# Altium PCB PCB1.PcbDoc (part 3 of 3)
Units mm, origin at the board's own origin, x right, y up, seen from the top; angles counter-clockwise.
Board outline 68.5 x 51.7 mm, 2 copper layers (Top Layer, Bottom Layer); 40 components, 24 nets, 162 pads, 41 vias.
Unrouted connection lines stored in the file: 2.
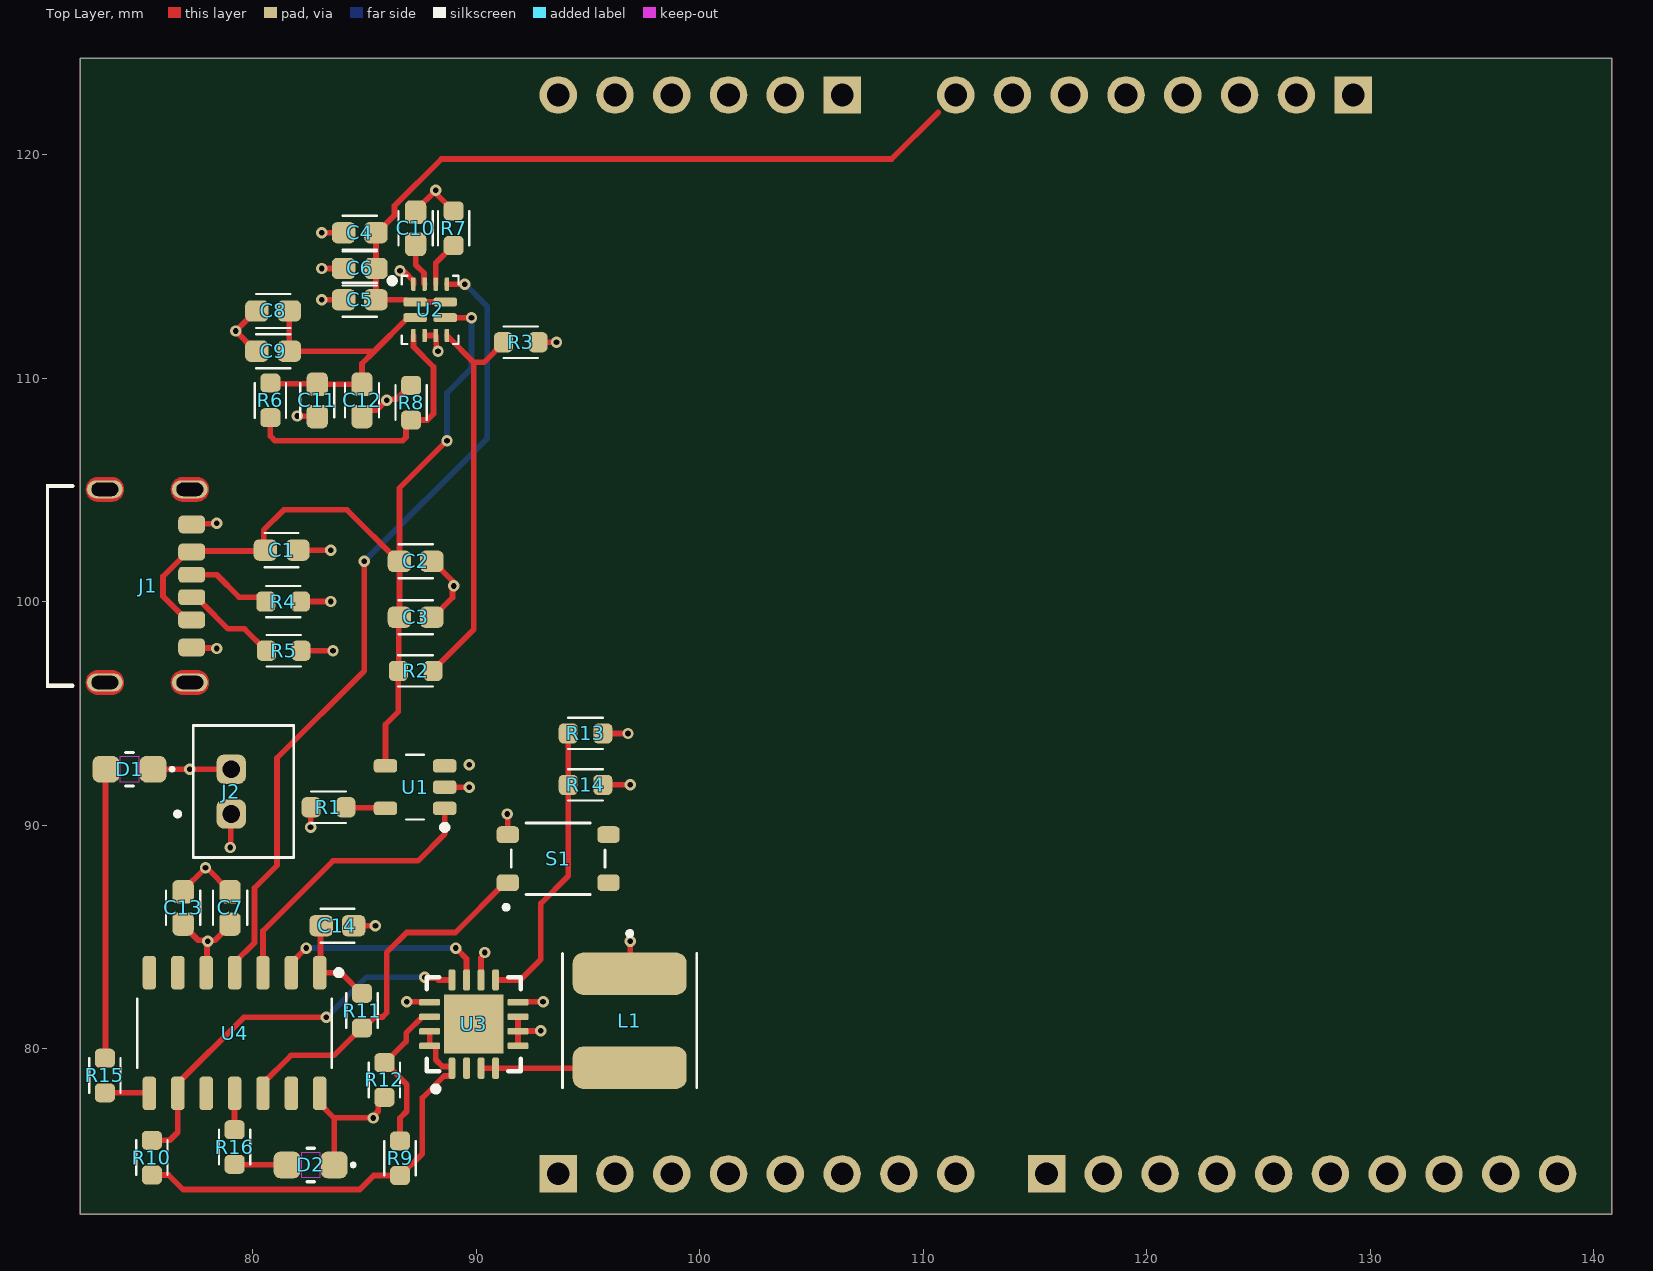
[diagram p0: Top Layer view]

## Part data (continued)
R14: library part "RESISTOR - GENERIC", "Res Thick Film 0603 390K Ohm 1% 0.1W(1/10W) ±100ppm/C Pad SMD T/R", .Case/Package=0603, .Tolerance=1%, Manufacturer="Yageo Group", Manufacturer Part Number=RC0603FR-07390KL, Max Operating Temperature=155°C, Max Power Dissipation=100mW, Min Operating Temperature=-55°C, Supplier Part Number=311-390KHRCT-ND, Temperature Coefficient=100ppm/°C, Voltage Rating=75V, Voltage Rating (AC)=50V, Case Code (Imperial)=0603, Case/Package=0603, Category="Chip SMD Resistors", China RoHS=Non-Compliant, ComponentLink1Description=https://datasheet.octopart.com:443/RC0603FR-07390KL-Yageo-datasheet-175887523.pdf?src-supplier=IHS, ComponentLink1URL=https://datasheet.octopart.com:443/RC0603FR-07390KL-Yageo-datasheet-175887523.pdf?src-supplier=IHS, ComponentLink2Description=https://datasheet.octopart.com:443/RC0603FR-07390KL-Yageo-datasheet-103092701.pdf?src-supplier=Upverter, ComponentLink2URL=https://datasheet.octopart.com:443/RC0603FR-07390KL-Yageo-datasheet-103092701.pdf?src-supplier=Upverter, ComponentLink3Description=https://datasheet.octopart.com:443/RC0603FR-07390KL-Yageo-datasheet-8328172.pdf?src-supplier=Newark, ComponentLink3URL=https://datasheet.octopart.com:443/RC0603FR-07390KL-Yageo-datasheet-8328172.pdf?src-supplier=Newark, ComponentLink4Description=https://datasheet.octopart.com:443/RC0603FR-07390KL-Yageo-datasheet-62067350.pdf?src-supplier=Newark, ComponentLink4URL=https://datasheet.octopart.com:443/RC0603FR-07390KL-Yageo-datasheet-62067350.pdf?src-supplier=Newark, ComponentLink5Description=https://datasheet.octopart.com:443/RC0603FR-07390KL-Yageo-datasheet-164759695.pdf?src-supplier=Future+Electronics, ComponentLink5URL=https://datasheet.octopart.com:443/RC0603FR-07390KL-Yageo-datasheet-164759695.pdf?src-supplier=Future+Electronics, ComponentLink6Description=https://datasheet.octopart.com:443/RC0603FR-07390KL-Yageo-datasheet-137700087.pdf?src-supplier=Future+Electronics, ComponentLink6URL=https://datasheet.octopart.com:443/RC0603FR-07390KL-Yageo-datasheet-137700087.pdf?src-supplier=Future+Electronics, ComponentLink7Description=https://datasheet.octopart.com:443/RC0603FR-07390KL-Yageo-datasheet-127823281.pdf?src-supplier=Future+Electronics, ComponentLink7URL=https://datasheet.octopart.com:443/RC0603FR-07390KL-Yageo-datasheet-127823281.pdf?src-supplier=Future+Electronics, ComponentLink8Description=https://datasheet.octopart.com:443/RC0603FR-07390KL-Yageo-datasheet-27584510.pdf?src-supplier=Future+Electronics, ComponentLink8URL=https://datasheet.octopart.com:443/RC0603FR-07390KL-Yageo-datasheet-27584510.pdf?src-supplier=Future+Electronics, ComponentLink9Description=https://datasheet.octopart.com:443/RC0603FR-07390KL-Yageo-datasheet-15599030.pdf?src-supplier=Future+Electronics, ComponentLink9URL=https://datasheet.octopart.com:443/RC0603FR-07390KL-Yageo-datasheet-15599030.pdf?src-supplier=Future+Electronics, ComponentLink10Description=https://datasheet.octopart.com:443/RC0603FR-07390KL-Yageo-datasheet-12596169.pdf?src-supplier=Future+Electronics, ComponentLink10URL=https://datasheet.octopart.com:443/RC0603FR-07390KL-Yageo-datasheet-12596169.pdf?src-supplier=Future+Electronics, ComponentLink11Description=https://datasheet.octopart.com:443/RC0603FR-07390KL-Yageo-datasheet-148775077.pdf?src-supplier=TME, ComponentLink11URL=https://datasheet.octopart.com:443/RC0603FR-07390KL-Yageo-datasheet-148775077.pdf?src-supplier=TME, ComponentLink12Description=https://datasheet.octopart.com/RC0603FR-07390KL-Yageo-datasheet-73766026.pdf, ComponentLink12URL=https://datasheet.octopart.com/RC0603FR-07390KL-Yageo-datasheet-73766026.pdf, ComponentLink13Description=https://datasheet.octopart.com:443/RC0603FR-07390KL-Yageo-datasheet-118562.pdf?src-supplier=DigiKey, ComponentLink13URL=https://datasheet.octopart.com:443/RC0603FR-07390KL-Yageo-datasheet-118562.pdf?src-supplier=DigiKey, ComponentLink14Description=http://sigma.octopart.com:80/rohs_statement/Yageo-company-2.pdf?src-supplier=Compliance+Statements, ComponentLink14URL=http://sigma.octopart.com:80/rohs_statement/Yageo-company-2.pdf?src-supplier=Compliance+Statements, ComponentLink15Description=http://sigma.octopart.com:80/conflict_mineral_statement/Yageo-company-3.pdf?src-supplier=Compliance+Statements, ComponentLink15URL=http://sigma.octopart.com:80/conflict_mineral_statement/Yageo-company-3.pdf?src-supplier=Compliance+Statements, Composition="Thick Film", Depth=800µm, Features="Moisture Resistant", Height=450µm, Lead Free="Lead Free", Length=1.6mm, Lifecycle Status=Production, Military Standard=Not, Mounting Technology="Surface Mount", Number of Terminals=2, Number of Terminations=2, Pins=2, Power Dissipation=100mW, Power Rating=100mW, Pricing="1=0,1, 10=0,007, 25=0,0068, 50=0,0062, 100=0,0051 (USD)", REACH SVHC=Yes, RoHS=Compliant, Schedule B="8533210045, 8533210045|8533210045, 8533210045|8533210045|8533210045, 8533210045|8533210045|8533210045|8533210045", Stock=23907, Supplier=DigiKey, Supplier 1=DigiKey, Supplier Part Number 1=311-390KHRCT-ND, Termination=SMD/SMT, Tolerance=1%, Voltage Rating (DC)=50V, Width=800µm, Working Voltage=75V
R15 R16: library part "RESISTOR - GENERIC", "Fixed Resistor, Thin Film, 0.1W, 470ohm, 75V, 1% +/-Tol, 50ppm/Cel, Surface Mount, 0603", .Case/Package=0603, .Tolerance=1%, Manufacturer="Yageo Group", Manufacturer Part Number=RT0603FRE07470RL, Max Operating Temperature=155°C, Min Operating Temperature=-55°C, Power Dissipation=100mW, Supplier Part Number=YAG5742CT-ND, Temperature Coefficient=50ppm/°C, Voltage Rating=75V, Case Code (Imperial)=0603, Case/Package=0603, Category="Chip SMD Resistors", China RoHS=Non-Compliant, ComponentLink1Description=https://datasheet.octopart.com:443/RT0603FRE07470RL-Yageo-datasheet-176402239.pdf?src-supplier=IHS, ComponentLink1URL=https://datasheet.octopart.com:443/RT0603FRE07470RL-Yageo-datasheet-176402239.pdf?src-supplier=IHS, ComponentLink2Description=https://datasheet.octopart.com:443/RT0603FRE07470RL-Yageo-datasheet-96443642.pdf?src-supplier=Upverter, ComponentLink2URL=https://datasheet.octopart.com:443/RT0603FRE07470RL-Yageo-datasheet-96443642.pdf?src-supplier=Upverter, ComponentLink3Description=https://datasheet.octopart.com:443/RT0603FRE07470RL-Yageo-Group-datasheet-188167888.pdf?src-supplier=TME, ComponentLink3URL=https://datasheet.octopart.com:443/RT0603FRE07470RL-Yageo-Group-datasheet-188167888.pdf?src-supplier=TME, ComponentLink4Description=https://datasheet.octopart.com:443/RT0603FRE07470RL-Yageo-datasheet-67645616.pdf?src-supplier=element14+APAC, ComponentLink4URL=https://datasheet.octopart.com:443/RT0603FRE07470RL-Yageo-datasheet-67645616.pdf?src-supplier=element14+APAC, ComponentLink5Description=https://datasheet.octopart.com:443/RT0603FRE07470RL-Yageo-datasheet-10915759.pdf?src-supplier=element14+APAC, ComponentLink5URL=https://datasheet.octopart.com:443/RT0603FRE07470RL-Yageo-datasheet-10915759.pdf?src-supplier=element14+APAC, ComponentLink6Description=https://datasheet.octopart.com:443/RT0603FRE07470RL-Yageo-datasheet-8324589.pdf?src-supplier=Newark, ComponentLink6URL=https://datasheet.octopart.com:443/RT0603FRE07470RL-Yageo-datasheet-8324589.pdf?src-supplier=Newark, ComponentLink7Description=https://datasheet.octopart.com:443/RT0603FRE07470RL-Yageo-datasheet-164439670.pdf?src-supplier=Newark, ComponentLink7URL=https://datasheet.octopart.com:443/RT0603FRE07470RL-Yageo-datasheet-164439670.pdf?src-supplier=Newark, ComponentLink8Description=https://datasheet.octopart.com:443/RT0603FRE07470RL-Yageo-datasheet-169971040.pdf?src-supplier=Future+Electronics, ComponentLink8URL=https://datasheet.octopart.com:443/RT0603FRE07470RL-Yageo-datasheet-169971040.pdf?src-supplier=Future+Electronics, ComponentLink9Description=https://datasheet.octopart.com:443/RT0603FRE07470RL-Yageo-datasheet-166250672.pdf?src-supplier=Future+Electronics, ComponentLink9URL=https://datasheet.octopart.com:443/RT0603FRE07470RL-Yageo-datasheet-166250672.pdf?src-supplier=Future+Electronics, ComponentLink10Description=https://datasheet.octopart.com:443/RT0603FRE07470RL-Yageo-datasheet-137700930.pdf?src-supplier=Future+Electronics, ComponentLink10URL=https://datasheet.octopart.com:443/RT0603FRE07470RL-Yageo-datasheet-137700930.pdf?src-supplier=Future+Electronics, ComponentLink11Description=https://datasheet.octopart.com:443/RT0603FRE07470RL-Yageo-Group-datasheet-141265893.pdf?src-supplier=ODG+(Origin+Data+Global), ComponentLink11URL=https://datasheet.octopart.com:443/RT0603FRE07470RL-Yageo-Group-datasheet-141265893.pdf?src-supplier=ODG+(Origin+Data+Global), ComponentLink12Description=https://datasheet.octopart.com/RT0603FRE07470RL-Yageo-datasheet-86813807.pdf, ComponentLink12URL=https://datasheet.octopart.com/RT0603FRE07470RL-Yageo-datasheet-86813807.pdf, ComponentLink13Description=http://sigma.octopart.com:80/rohs_statement/Yageo-company-2.pdf?src-supplier=Compliance+Statements, ComponentLink13URL=http://sigma.octopart.com:80/rohs_statement/Yageo-company-2.pdf?src-supplier=Compliance+Statements, ComponentLink14Description=http://sigma.octopart.com:80/conflict_mineral_statement/Yageo-company-3.pdf?src-supplier=Compliance+Statements, ComponentLink14URL=http://sigma.octopart.com:80/conflict_mineral_statement/Yageo-company-3.pdf?src-supplier=Compliance+Statements, Composition="Thin Film", Depth=800µm, Height=450µm, Lead Free="Lead Free", Length=1.6mm, Lifecycle Status=Production, Military Standard=Not, Mounting Technology="Surface Mount", Number of Terminals=2, Pins=2, Power Rating=100mW, Pricing="1=0,1, 10=0,010, 25=0,0096, 50=0,0092, 100=0,0087, 250=0,00808, 1000=0,00764 (USD)", REACH SVHC=Yes, RoHS=Compliant, Schedule B="8533210045, 8533210045|8533210045|8533210045|8533210045|8533210045|8533210045|8533210045|8533210045|8533210045|8533210045|8533210045|8533210045|8533210045|8533210045, 8533210045|8533210045|8533210045|8533210045|8533210045|8533210045|8533210045|8533210045|8533210045|8533210045|8533210045|8533210045|8533210045|8533210045|8533210045, 8533210045|8533210045|8533210045|8533210045|8533210045|8533210045|8533210045|8533210045|8533210045|8533210045|8533210045|8533210045|8533210045|8533210045|8533210045|8533210045", Stock=23049, Supplier=DigiKey, Supplier 1=DigiKey, Supplier Part Number 1=YAG5742CT-ND, Termination=SMD/SMT, Tolerance=1%, Voltage Rating (DC)=75V, Width=800µm, Working Voltage=75V
S1: "Switch Tactile N.O. SPST Button Gull Wing 0.05A 12VDC 100000Cycles 1.77N SMD", Contact Resistance=100mΩ, Insulation Resistance=100MΩ, Manufacturer=E-Switch, Max Current Rating=50mA, Max Operating Temperature=70°C, Max Voltage Rating (DC)=12V, Min Operating Temperature=-20°C, Operating Force=1.76N, Package=None, Supplier Part Number=EG5384CT-ND, Category="Tactile Switches", Check_prices=https://www.snapeda.com/parts/TL3365AF180QG/E-Switch/view-part/?ref=eda, ComponentLink1Description=https://datasheet.octopart.com:443/TL3365AF180QG-E-Switch-datasheet-182203474.pdf?src-supplier=IHS, ComponentLink1URL=https://datasheet.octopart.com:443/TL3365AF180QG-E-Switch-datasheet-182203474.pdf?src-supplier=IHS, ComponentLink2Description=https://datasheet.octopart.com:443/TL3365AF180QG-E-Switch-datasheet-188936971.pdf?src-supplier=TME, ComponentLink2URL=https://datasheet.octopart.com:443/TL3365AF180QG-E-Switch-datasheet-188936971.pdf?src-supplier=TME, ComponentLink3Description=https://datasheet.octopart.com:443/TL3365AF180QG-E-Switch-datasheet-62330653.pdf?src-supplier=Electro+Sonic, ComponentLink3URL=https://datasheet.octopart.com:443/TL3365AF180QG-E-Switch-datasheet-62330653.pdf?src-supplier=Electro+Sonic, ComponentLink4Description=https://datasheet.octopart.com:443/TL3365AF180QG-E-Switch-datasheet-181955371.pdf?src-supplier=Farnell, ComponentLink4URL=https://datasheet.octopart.com:443/TL3365AF180QG-E-Switch-datasheet-181955371.pdf?src-supplier=Farnell, ComponentLink5Description=https://datasheet.octopart.com:443/TL3365AF180QG-E-Switch-datasheet-62330039.pdf?src-supplier=Newark, ComponentLink5URL=https://datasheet.octopart.com:443/TL3365AF180QG-E-Switch-datasheet-62330039.pdf?src-supplier=Newark, ComponentLink6Description=https://datasheet.octopart.com:443/TL3365AF180QG-E-Switch-datasheet-155697103.pdf?src-supplier=RS+(Formerly+Allied+Electronics), ComponentLink6URL=https://datasheet.octopart.com:443/TL3365AF180QG-E-Switch-datasheet-155697103.pdf?src-supplier=RS+(Formerly+Allied+Electronics), Contact Material=Silver, Electrical Life=100kcycles, Height=1.55mm, Illumination Type=Non-Illuminated, Lead Free="Lead Free", Length=4.2mm, Lifecycle Status=Production, Manufacturer Part Number=TL3365AF180QG, Mechanical Life=100kcycles, MF=E-Switch, Mounting Technology="Surface Mount", MP=TL3365AF180QG, Number of Positions=1, Pricing="1=0,21, 10=0,181, 25=0,1696, 100=0,1522, 250=0,1412, 500=0,13324, 1000=0,12576 (USD)", REACH SVHC=Yes, RoHS=Compliant, SnapEDA_Link=https://www.snapeda.com/parts/TL3365AF180QG/E-Switch/view-part/?ref=snap, Stock=31658, Supplier=DigiKey, Supplier 1=DigiKey, Supplier Part Number 1=EG5384CT-ND, Switch Function=Off-Mom, Switch Travel=200µm, Termination="Gull Wing", Throw Configuration=SPST
U1: "Linear Battery Charger Controller Li-Ion/Li-Pol 505mA 4.2V 5-Pin SOT-23 T/R", Ambient Temperature Range High=85°C, Case/Package=SOT-23-5, Manufacturer=Microchip, Max Charge Current=500mA, Max Junction Temperature (Tj)=125°C, Max Output Voltage=4.232V, Max Supply Voltage=3.75V, Min Operating Temperature=-40°C, Min Output Voltage=4.168V, Nominal Supply Voltage=6V, Operating Supply Current=510µA, Output Voltage=4.2V, Supplier Part Number=MCP73831T-2DCI/OTCT-ND, Category="Battery Management", ComponentLink1Description=https://datasheet.octopart.com:443/MCP73831T-2DCI/OT-Microchip-datasheet-8814540.pdf?src-supplier=Electro+Sonic, ComponentLink1URL=https://datasheet.octopart.com:443/MCP73831T-2DCI/OT-Microchip-datasheet-8814540.pdf?src-supplier=Electro+Sonic, ComponentLink2Description=https://datasheet.octopart.com:443/MCP73831T-2DCI-OT-Microchip-datasheet-16123459.pdf?src-supplier=Upverter, ComponentLink2URL=https://datasheet.octopart.com:443/MCP73831T-2DCI-OT-Microchip-datasheet-16123459.pdf?src-supplier=Upverter, ComponentLink3Description=https://datasheet.octopart.com:443/MCP73831T-2DCI-OT-Microchip-datasheet-34193478.pdf?src-supplier=Farnell, ComponentLink3URL=https://datasheet.octopart.com:443/MCP73831T-2DCI-OT-Microchip-datasheet-34193478.pdf?src-supplier=Farnell, ComponentLink4Description=https://datasheet.octopart.com:443/MCP73831T-2DCI-OT-Microchip-datasheet-145017548.pdf?src-supplier=Microchip, ComponentLink4URL=https://datasheet.octopart.com:443/MCP73831T-2DCI-OT-Microchip-datasheet-145017548.pdf?src-supplier=Microchip, ComponentLink5Description=https://datasheet.octopart.com:443/MCP73831T-2DCI-OT-Microchip-datasheet-16593012.pdf?src-supplier=element14+APAC, ComponentLink5URL=https://datasheet.octopart.com:443/MCP73831T-2DCI-OT-Microchip-datasheet-16593012.pdf?src-supplier=element14+APAC, ComponentLink6Description=https://datasheet.octopart.com:443/MCP73831T-2DCI-OT-Microchip-datasheet-158592061.pdf?src-supplier=SHENGYU+ELECTRONICS, ComponentLink6URL=https://datasheet.octopart.com:443/MCP73831T-2DCI-OT-Microchip-datasheet-158592061.pdf?src-supplier=SHENGYU+ELECTRONICS, ComponentLink7Description=https://datasheet.octopart.com:443/MCP73831T-2DCI/OT-Microchip-datasheet-98419.pdf?src-supplier=Mouser, ComponentLink7URL=https://datasheet.octopart.com:443/MCP73831T-2DCI/OT-Microchip-datasheet-98419.pdf?src-supplier=Mouser, ComponentLink8Description=https://datasheet.octopart.com:443/MCP73831T-2DCI/OT-Microchip-datasheet-39874.pdf?src-supplier=DigiKey, ComponentLink8URL=https://datasheet.octopart.com:443/MCP73831T-2DCI/OT-Microchip-datasheet-39874.pdf?src-supplier=DigiKey, ComponentLink9Description=http://sigma.octopart.com:80/188449423/materials_sheet/Microchip-MCP73831T-2DCI-OT.pdf?src-supplier=Compliance+Statements, ComponentLink9URL=http://sigma.octopart.com:80/188449423/materials_sheet/Microchip-MCP73831T-2DCI-OT.pdf?src-supplier=Compliance+Statements, ComponentLink10Description=http://sigma.octopart.com:80/conflict_mineral_statement/Microchip-company-68.pdf?src-supplier=Compliance+Statements, ComponentLink10URL=http://sigma.octopart.com:80/conflict_mineral_statement/Microchip-company-68.pdf?src-supplier=Compliance+Statements, ComponentLink11Description=http://sigma.octopart.com:80/conflict_mineral_statement/Microchip-company-69.pdf?src-supplier=Compliance+Statements, ComponentLink11URL=http://sigma.octopart.com:80/conflict_mineral_statement/Microchip-company-69.pdf?src-supplier=Compliance+Statements, ComponentLink12Description=http://sigma.octopart.com:80/reach_statement/Microchip-company-70.pdf?src-supplier=Compliance+Statements, ComponentLink12URL=http://sigma.octopart.com:80/reach_statement/Microchip-company-70.pdf?src-supplier=Compliance+Statements, ComponentLink13Description=http://sigma.octopart.com:80/rohs_statement/Microchip-company-71.pdf?src-supplier=Compliance+Statements, ComponentLink13URL=http://sigma.octopart.com:80/rohs_statement/Microchip-company-71.pdf?src-supplier=Compliance+Statements, Contact Plating=Tin, Country of Assembly=Thailand, Country of Fabrication="United States of America", Country of Origin=Thailand, Export Control Classification Number (ECCN) Code=EAR99, Harmonized Tariff Schedule (HTS) Code=8542.39.0060, Height=1.45mm, Introduction Date=2005-11-03, Length=3.1mm, Lifecycle Status=Production, Manufacturer Part Number=MCP73831T-2DCI/OT, Max Operating Temperature=85°C, Max Output current=500mA, Min Supply Voltage=3.75V, Mounting Technology="Surface Mount", Number of Cells=1, Number of Channels=1, Number of Outputs=1, Output Current=500mA, Pins=5, Pricing="1=0,76, 25=0,63, 100=0,6125 (USD)", Projected EOL Date=2034-11-03, Radiation Hardening=No, REACH SVHC=No, RoHS=Compliant, Schedule B="8542390000, 8542390000|8542390000|8542390000|8542390000|8542390000", Stock=7422, Supplier=DigiKey, Supplier 1=DigiKey, Supplier Part Number 1=MCP73831T-2DCI/OTCT-ND, Width=1.8mm
U2: "2.7-V to 22-V, 56-mΩ, 4.5-A, power mux with seamless switchover 12-VQFN-HR -40 to 125", Manufacturer="Texas Instruments", Manufacturer Lifecycle Status=ACTIVE, Max Junction Temperature (Tj)=125°C, Max Supply Voltage=22V, Min Operating Temperature=-40°C, Min Supply Voltage=2.8V, Nominal Supply Current=300µA, Supplier Part Number=296-53410-1-ND, Category="Power Management ICs", ComponentLink1Description=https://octopart.com:443/opatz8j6/c1?t=u__eRulNICzvJgw_uF5jZE4VewBqqVxAEhH6a5865kfiBS97munyJHNwR89MOISaNIlCSIK0p6tyYn4vgEUwA00NusdUrfnqEnnmQHin85Zj7Xz-CnabDGGSIMRYEyZQyUZ9_1lQhHv-e10ijzu5Fv9_tN07M4ouzl3dHDLjVRc4zqqNSbdG7ZpopHa8efgiYSe1iOCqV1SOo3tsaJDthmCWARnaKZ9V2q5WV2HmYoAlkLRJzefOURIjiIua_VTxhiCJdWFvuMhq2aqOyeKhwV9xg5H8ABnwy4ffoCjAbE9kSmNx4Gy2EKE46MjxT9GaZ6IXNuY9WZuTkrZzflCjnBM8kCWZn_jdciZqHXwHUUgC-0cOcFywywnpHLiGbymgn1lU5mc&src-supplier=Texas+Instruments, ComponentLink1URL=https://octopart.com:443/opatz8j6/c1?t=u__eRulNICzvJgw_uF5jZE4VewBqqVxAEhH6a5865kfiBS97munyJHNwR89MOISaNIlCSIK0p6tyYn4vgEUwA00NusdUrfnqEnnmQHin85Zj7Xz-CnabDGGSIMRYEyZQyUZ9_1lQhHv-e10ijzu5Fv9_tN07M4ouzl3dHDLjVRc4zqqNSbdG7ZpopHa8efgiYSe1iOCqV1SOo3tsaJDthmCWARnaKZ9V2q5WV2HmYoAlkLRJzefOURIjiIua_VTxhiCJdWFvuMhq2aqOyeKhwV9xg5H8ABnwy4ffoCjAbE9kSmNx4Gy2EKE46MjxT9GaZ6IXNuY9WZuTkrZzflCjnBM8kCWZn_jdciZqHXwHUUgC-0cOcFywywnpHLiGbymgn1lU5mc&src-supplier=Texas+Instruments, ComponentLink2Description=http://sigma.octopart.com:80/conflict_mineral_statement/Texas-Instruments-company-63.pdf?src-supplier=Compliance+Statements, ComponentLink2URL=http://sigma.octopart.com:80/conflict_mineral_statement/Texas-Instruments-company-63.pdf?src-supplier=Compliance+Statements, ComponentLink3Description=http://sigma.octopart.com:80/reach_statement/Texas-Instruments-company-64.pdf?src-supplier=Compliance+Statements, ComponentLink3URL=http://sigma.octopart.com:80/reach_statement/Texas-Instruments-company-64.pdf?src-supplier=Compliance+Statements, Height=1mm, Length=2.5mm, Lifecycle Status=Production, Manufacturer Part Number=TPS2121RUXR, Max Operating Temperature=125°C, Number of Outputs=1, Output Voltage=22V, Pins=12, Pricing="1=2,37, 10=1,76, 25=1,6072, 100=1,4391, 250=1,35892, 500=1,31058, 1000=1,27078 (USD)", RoHS=Compliant, Schedule B="8542390000, 8542390000|8542390000|8542390000|8542390000|8542390000", Stock=9752, Supplier=DigiKey, Supplier 1=DigiKey, Supplier Part Number 1=296-53410-1-ND, Thickness=900µm, Width=2mm
U3: "Conv DC-DC 1.8V to 5.5V Synchronous Step Up Single-Out 1.8V to 5.5V 0.5A 16-Pin VQFN EP T/R", Case/Package=VQFN, Manufacturer="Texas Instruments", Manufacturer Lifecycle Status=ACTIVE, Max Operating Temperature=85°C, Max Output current=500mA, Max Output Voltage=5.5V, Min Input Voltage=1.8V, Min Operating Temperature=-40°C, Output Current=2A, Quiescent Current=20µA, Supplier Part Number=296-15259-1-ND, Switching Frequency=600kHz, Category="Voltage Regulators - Switching", ComponentLink1Description=https://sigma.octopart.com:443/179129134/technical_drawing/Texas-Instruments-TPS61090RSAR.pdf?src-supplier=Texas+Instruments, ComponentLink1URL=https://sigma.octopart.com:443/179129134/technical_drawing/Texas-Instruments-TPS61090RSAR.pdf?src-supplier=Texas+Instruments, ComponentLink2Description=https://octopart.com:443/opatz8j6/c1?t=AcQooj3JlTCfhk3VCQUH-aAEBr0wyTfCDEA-x6NEZ2xxPhV97yYYZYKTTzI7ie9NC3rdJUsYEK6CyX6awGzEEcrHtZ_ArfXYtmPr4gKKxI6Kw8agxWkgC3a2xDsXlg-O0fwghwbpb1suK4tlMeroK7wll2-51HzAXEG_iTs83j7TVMfk2sV4EMpy0PTSYrurZmHHqCG8wItxv2OJGrxcCnvFFnZFhd76piKxGXXAjHyftSJJey1je6ukqBFTD2_84SHs_29Ug4OcTy7-Co2GNmDvY-nPAqSt9tN4wM5hyRbOZfDv3RSxiNHdEGiQsBGArixu2cBpknAywPbL-YnUby8ljK6CPTzRMlcqP5D6VeYBdVJmVC4HGqOiiiiHSo5hvGoQOQ&src-supplier=Texas+Instruments, ComponentLink2URL=https://octopart.com:443/opatz8j6/c1?t=AcQooj3JlTCfhk3VCQUH-aAEBr0wyTfCDEA-x6NEZ2xxPhV97yYYZYKTTzI7ie9NC3rdJUsYEK6CyX6awGzEEcrHtZ_ArfXYtmPr4gKKxI6Kw8agxWkgC3a2xDsXlg-O0fwghwbpb1suK4tlMeroK7wll2-51HzAXEG_iTs83j7TVMfk2sV4EMpy0PTSYrurZmHHqCG8wItxv2OJGrxcCnvFFnZFhd76piKxGXXAjHyftSJJey1je6ukqBFTD2_84SHs_29Ug4OcTy7-Co2GNmDvY-nPAqSt9tN4wM5hyRbOZfDv3RSxiNHdEGiQsBGArixu2cBpknAywPbL-YnUby8ljK6CPTzRMlcqP5D6VeYBdVJmVC4HGqOiiiiHSo5hvGoQOQ&src-supplier=Texas+Instruments, ComponentLink3Description=https://datasheet.octopart.com:443/TPS61090RSAR-Texas-Instruments-datasheet-10258986.pdf?src-supplier=Texas+Instruments, ComponentLink3URL=https://datasheet.octopart.com:443/TPS61090RSAR-Texas-Instruments-datasheet-10258986.pdf?src-supplier=Texas+Instruments, ComponentLink4Description=https://sigma.octopart.com:443/49250404/technical_drawing/Texas-Instruments-TPS61090RSAR.pdf?src-supplier=Texas+Instruments, ComponentLink4URL=https://sigma.octopart.com:443/49250404/technical_drawing/Texas-Instruments-TPS61090RSAR.pdf?src-supplier=Texas+Instruments, ComponentLink5Description=https://datasheet.octopart.com:443/TPS61090RSAR-Texas-Instruments-datasheet-149524.pdf?src-supplier=Texas+Instruments, ComponentLink5URL=https://datasheet.octopart.com:443/TPS61090RSAR-Texas-Instruments-datasheet-149524.pdf?src-supplier=Texas+Instruments, ComponentLink6Description=https://datasheet.octopart.com:443/TPS61090RSAR-Texas-Instruments-datasheet-128166.pdf?src-supplier=Texas+Instruments, ComponentLink6URL=https://datasheet.octopart.com:443/TPS61090RSAR-Texas-Instruments-datasheet-128166.pdf?src-supplier=Texas+Instruments, ComponentLink7Description=https://datasheet.octopart.com:443/TPS61090RSAR-Texas-Instruments-datasheet-34157647.pdf?src-supplier=Newark, ComponentLink7URL=https://datasheet.octopart.com:443/TPS61090RSAR-Texas-Instruments-datasheet-34157647.pdf?src-supplier=Newark, ComponentLink8Description=https://datasheet.octopart.com:443/TPS61090RSAR-Texas-Instruments-datasheet-21222488.pdf?src-supplier=Newark, ComponentLink8URL=https://datasheet.octopart.com:443/TPS61090RSAR-Texas-Instruments-datasheet-21222488.pdf?src-supplier=Newark, ComponentLink9Description=https://datasheet.octopart.com:443/TPS61090RSAR-Texas-Instruments-datasheet-14439414.pdf?src-supplier=Upverter, ComponentLink9URL=https://datasheet.octopart.com:443/TPS61090RSAR-Texas-Instruments-datasheet-14439414.pdf?src-supplier=Upverter, ComponentLink10Description=https://datasheet.octopart.com:443/TPS61090RSAR-Texas-Instruments-datasheet-66807785.pdf?src-supplier=Farnell, ComponentLink10URL=https://datasheet.octopart.com:443/TPS61090RSAR-Texas-Instruments-datasheet-66807785.pdf?src-supplier=Farnell, ComponentLink11Description=https://datasheet.octopart.com:443/TPS61090RSAR-Texas-Instruments-datasheet-14167026.pdf?src-supplier=iiiC, ComponentLink11URL=https://datasheet.octopart.com:443/TPS61090RSAR-Texas-Instruments-datasheet-14167026.pdf?src-supplier=iiiC, ComponentLink12Description=https://datasheet.octopart.com:443/TPS61090RSAR-Texas-Instruments-datasheet-61172.pdf?src-supplier=DigiKey, ComponentLink12URL=https://datasheet.octopart.com:443/TPS61090RSAR-Texas-Instruments-datasheet-61172.pdf?src-supplier=DigiKey, ComponentLink13Description=https://datasheet.octopart.com:443/TPS61090RSAR-Texas-Instruments-datasheet-112952.pdf?src-supplier=Sierra+IC, ComponentLink13URL=https://datasheet.octopart.com:443/TPS61090RSAR-Texas-Instruments-datasheet-112952.pdf?src-supplier=Sierra+IC, ComponentLink14Description=http://sigma.octopart.com:80/conflict_mineral_statement/Texas-Instruments-company-63.pdf?src-supplier=Compliance+Statements, ComponentLink14URL=http://sigma.octopart.com:80/conflict_mineral_statement/Texas-Instruments-company-63.pdf?src-supplier=Compliance+Statements, ComponentLink15Description=http://sigma.octopart.com:80/reach_statement/Texas-Instruments-company-64.pdf?src-supplier=Compliance+Statements, ComponentLink15URL=http://sigma.octopart.com:80/reach_statement/Texas-Instruments-company-64.pdf?src-supplier=Compliance+Statements, Efficiency=96%, Height=1mm, Length=4mm, Lifecycle Status=Production, Manufacturer Part Number=TPS61090RSAR, Max Supply Voltage=5.5V, Min Output Voltage=1.8V, Mounting Technology="Surface Mount", Number of Outputs=1, Operating Supply Voltage=5.5V, Output Configuration=Positive, Output Type=Adjustable, Output Voltage=5.5V, Packaging="Tape & Reel", Pins=16, Pricing="1=2,71, 10=2,022, 25=1,8492, 100=1,6598, 250=1,56936, 500=1,51484, 1000=1,46998 (USD)", Radiation Hardening=No, RoHS=Compliant, Schedule B=8542390000, Stock=9675, Supplier=DigiKey, Supplier 1=DigiKey, Supplier Part Number 1=296-15259-1-ND, Synchronous Rectifier=Yes, Thickness=900µm, Topology=Boost, Weight=41.503702mg, Width=4mm
U4: "MCU 8-Bit ATTINY414 AVR RISC 4KB Flash 2.7V to 5.5V 14-Pin SOIC T/R - Tape and Reel", Case/Package=SOIC, Frequency=16MHz, Manufacturer=Microchip, Max Operating Temperature=125°C, Max Supply Voltage=5.5V, Min Operating Temperature=-40°C, Min Supply Voltage=2.7V, Supplier Part Number=ATTINY414-SSFRCT-ND, Category=Microcontrollers, ComponentLink1Description=https://datasheet.octopart.com:443/ATTINY414-SSFR-Microchip-datasheet-150471216.pdf?src-supplier=Microchip, ComponentLink1URL=https://datasheet.octopart.com:443/ATTINY414-SSFR-Microchip-datasheet-150471216.pdf?src-supplier=Microchip, ComponentLink2Description=https://datasheet.octopart.com:443/ATTINY414-SSFR-Microchip-datasheet-147334551.pdf?src-supplier=Microchip, ComponentLink2URL=https://datasheet.octopart.com:443/ATTINY414-SSFR-Microchip-datasheet-147334551.pdf?src-supplier=Microchip, ComponentLink3Description=https://datasheet.octopart.com:443/ATTINY414-SSFR-Microchip-datasheet-95794647.pdf?src-supplier=SHENGYU+ELECTRONICS, ComponentLink3URL=https://datasheet.octopart.com:443/ATTINY414-SSFR-Microchip-datasheet-95794647.pdf?src-supplier=SHENGYU+ELECTRONICS, ComponentLink4Description=https://datasheet.octopart.com:443/ATTINY414-SSFR-Microchip-datasheet-137472778.pdf?src-supplier=Electro+Sonic, ComponentLink4URL=https://datasheet.octopart.com:443/ATTINY414-SSFR-Microchip-datasheet-137472778.pdf?src-supplier=Electro+Sonic, ComponentLink5Description=https://datasheet.octopart.com:443/ATTINY414-SSFR-Microchip-datasheet-95834867.pdf?src-supplier=Future+Electronics, ComponentLink5URL=https://datasheet.octopart.com:443/ATTINY414-SSFR-Microchip-datasheet-95834867.pdf?src-supplier=Future+Electronics, ComponentLink6Description=https://datasheet.octopart.com:443/ATTINY414-SSFR-Microchip-datasheet-147334554.pdf?src-supplier=Microchip+SCT, ComponentLink6URL=https://datasheet.octopart.com:443/ATTINY414-SSFR-Microchip-datasheet-147334554.pdf?src-supplier=Microchip+SCT, ComponentLink7Description=https://datasheet.octopart.com:443/ATTINY414-SSFR-Microchip-datasheet-92899103.pdf?src-supplier=TME, ComponentLink7URL=https://datasheet.octopart.com:443/ATTINY414-SSFR-Microchip-datasheet-92899103.pdf?src-supplier=TME, ComponentLink8Description=http://sigma.octopart.com:80/188449420/materials_sheet/Microchip-ATTINY414-SSFR.pdf?src-supplier=Compliance+Statements, ComponentLink8URL=http://sigma.octopart.com:80/188449420/materials_sheet/Microchip-ATTINY414-SSFR.pdf?src-supplier=Compliance+Statements, ComponentLink9Description=http://sigma.octopart.com:80/rohs_statement/Microchip-company-71.pdf?src-supplier=Compliance+Statements, ComponentLink9URL=http://sigma.octopart.com:80/rohs_statement/Microchip-company-71.pdf?src-supplier=Compliance+Statements, ComponentLink10Description=http://sigma.octopart.com:80/reach_statement/Microchip-company-70.pdf?src-supplier=Compliance+Statements, ComponentLink10URL=http://sigma.octopart.com:80/reach_statement/Microchip-company-70.pdf?src-supplier=Compliance+Statements, ComponentLink11Description=http://sigma.octopart.com:80/conflict_mineral_statement/Microchip-company-69.pdf?src-supplier=Compliance+Statements, ComponentLink11URL=http://sigma.octopart.com:80/conflict_mineral_statement/Microchip-company-69.pdf?src-supplier=Compliance+Statements, ComponentLink12Description=http://sigma.octopart.com:80/conflict_mineral_statement/Microchip-company-68.pdf?src-supplier=Compliance+Statements, ComponentLink12URL=http://sigma.octopart.com:80/conflict_mineral_statement/Microchip-company-68.pdf?src-supplier=Compliance+Statements, Core Architecture=AVR, Country of Assembly=Thailand, Country of Fabrication="Taiwan, United States of America", Country of Origin="Taiwan, Thailand", Data Bus Width=8b, Export Control Classification Number (ECCN) Code=EAR99, Harmonized Tariff Schedule (HTS) Code=8542.31.0015, Height=1.75mm, Interface="2-Wire, I2C, IrDA, SPI, UART, USART", Lifecycle Status=Production, Manufacturer Part Number=ATTINY414-SSFR, Memory Format=FLASH, Memory Size=4kB, Number of A/D Converters=1, Number of ADC Channels=10, Number of I2C Channels=1, Number of I/Os=12, Number of PWM Channels=6, Number of SPI Channels=1, Number of Timers/Counters=3, Number of UART Channels=1, Packaging="Cut Tape", Pins=14, Pricing="1=0,71, 25=0,65, 100=0,59 (USD)", Projected EOL Date=2044-09-13, RAM Size=256B, RoHS=Compliant, Stock=15503, Supplier=DigiKey, Supplier 1=DigiKey, Supplier Part Number 1=ATTINY414-SSFRCT-ND

## Free pads (board coordinates)
  round 1.676 hole 1.016: 3V3(121.616,122.66) 5V(119.076,122.66) A1(103.836,122.66) A2(101.296,122.66) A3(98.756,122.66) A4(96.216,122.66) A4_SDA(135.84,74.4) A5(93.676,122.66) A5_SCL(138.38,74.4) AREF(133.3,74.4) D1(96.216,74.4) D2(98.756,74.4) D3(101.296,74.4) D4(103.836,74.4) D5(106.376,74.4) D6(108.916,74.4) D7(111.456,74.4) D9(118.06,74.4) D10(120.6,74.4) D11(123.14,74.4) D12(125.68,74.4) D13(128.22,74.4) GND_1(113.996,122.66) GND_2(116.536,122.66) GND_3(130.76,74.4) IOREF(126.696,122.66) RST(124.156,122.66) VIN(111.456,122.66)
  rect 1.676x1.676 / inner round 1.676 / far side rect 1.676x1.676 hole 1.016: A0(106.376,122.66) D0(93.676,74.4) D8(115.52,74.4) P1(129.236,122.66)

## Via types
v1: diameter 0.508, hole 0.254, Top Layer to Bottom Layer, 41 vias

## Nets (pads, with @x,y where several pads share a name; then routed paths per layer and width w, separated by ;. In a path a pad name is that pad's centre, name@x,y a point inside that pad or via, vN(x,y) a via of type N, cw(c..) or ccw(c..) an arc to the next point about the centre after c; other vN are vias at no path point)
+5: C1.2 C2.1 C3.2 J1.A9 J1.B9 R2.2 U1.4 U2.7 | length 38.8
  Top Layer w0.254: J1.A9 77.06,99.18 76,100.24 76,101.127 77.093,102.22 J1.B9 ; J1.B9@77.28,102.26 80.535,102.26 C1.2 80.5,102.375 80.5,103.2 81.4,104.1 84.225,104.1 86.525,101.8 C2.1 ; U1.4 85.95,94.5 86.525,95.075 R2.2 86.55,96.925 86.55,99.275 C3.2 C2.1 ; U2.7 v1(89.8,112.7) ; v1(88.7,107.2) 86.575,105.075 C2.1
  Bottom Layer w0.254: v1(88.7,107.2) 88.7,109.334 89.8,110.434 v1(89.8,112.7)
+VBAT: C7.1 C13.1 J2.1 L1.1 R13.1 U1.3 U3.8 U4.5 | length 9.5
  Top Layer w0.254: C13.1 76.9,85.525 77.576,84.849 77.951,84.849 v1(78,84.8) ; U4.5 77.965,83.435 77.965,84.765 v1(78,84.8) ; C7.1 79,85.525 78.324,84.849 78.049,84.849 v1(78,84.8) ; v1(79,89) 79.025,89.025 79.025,90.475 J2.1 ; U3.8 91.898,82.098 92.363,82.098 92.365,82.1 v1(93,82.1) ; R13.1 v1(96.8,94.1) ; L1.1 96.9,83.375 v1(96.9,84.8)
  other v1: 89.7,92.7
Batery_Charging: U1.1 U4.3 | length 12.9
  Top Layer w0.254: U4.3 80.47,85.27 83.6,88.4 87.4,88.4 88.6,89.6 U1.1
BOOST_OUT: C8.1 C9.2 C11.1 C12.2 R6.2 R9.1 R10.1 U2.2 U3.1 U3.15 U3.16 | length 33.5
  Top Layer w0.254: R10.1 76.25,74.35 76.9,73.7 84.8,73.7 85.425,74.325 R9.1 ; R6.2 80.825,109.75 82.875,109.75 C11.1 C12.2 84.9,110.65 85.425,111.175 ; C8.1 C9.2 85.4,111.2 85.425,111.175 ; R9.1@86.625,74.325 87.6,75.3 87.6,77.8 88.575,78.775 U3.1@88.9,78.775 ; U2.2 86.95,112.7 85.425,111.175 ; U3.15 U3.16 88.175,80.125 88.198,80.102 88.198,79.502 88.5,79.2 88.902,79.2 88.925,79.177 U3.1
EN_BOOST: U3.11 U4.2 | length 9.7
  Top Layer w0.254: U4.2 81.74,83.84 v1(82.4,84.5) ; v1(89.1,84.5) 89.575,84.025 U3.11
  Bottom Layer w0.254: v1(82.4,84.5) v1(89.1,84.5)
GND: C1.1 C2.2 C3.1 C4.2 C5.1 C6.2 C7.2 C8.2 C9.1 C10.2 C11.2 C12.1 C13.2 C14.1 D1.1 D2.1 J1.A12 J1.B12 J1.S1 J1.S2 J1.S3 J1.S4 J2.2 R1.1 R3.2 R4.2 R5.2 R7.2 R8.2 R12.2 R14.2 S1.3 U1.2 U2.4 U2.5 U2.12 U3.5 U3.6 U3.7 U3.10 U3.13 U4.14 | length 47.5
  Top Layer w0.254: D1.1 v1(77.2,92.5) J2.2 ; C13.2 76.9,87.088 77.9,88.087 v1(77.9,88.1) 77.937,88.1 79,87.037 C7.2 ; J1.A12 77.305,97.925 78.375,97.925 v1(78.4,97.9) ; J1.B12 77.305,103.475 78.375,103.475 v1(78.4,103.5) ; C9.1 80.15,111.2 v1(79.25,112.1) 80.15,113 C8.2 ; v1(82,108.3) 82.013,108.287 82.887,108.287 C11.2 ; C1.1 v1(83.5,102.3) ; R4.2 v1(83.5,100) ; R5.2 v1(83.6,97.8) ; v1(82.6,89.9) 82.613,89.913 82.613,90.787 R1.1 ; U4.14 83.01,77.55 83.654,76.906 ; v1(83.1,113.5) C5.1 ; v1(83.1,114.9) C6.2 ; v1(83.1,116.5) C4.2 ; D2.1 83.654,76.906 ; C14.1 v1(85.5,85.5) ; C12.1 85.176,108.551 85.551,108.551 v1(86,109) 86.049,109.049 86.437,109.049 87.063,109.675 R8.2 ; R12.2 85.63,77.555 85.63,77.199 85.4,76.969 v1(85.4,76.9) 85.394,76.906 83.654,76.906 ; v1(86.6,114.8) 86.649,114.751 86.795,114.751 87.2,114.346 U2.12 ; v1(86.9,82.1) 87.529,82.1 87.531,82.098 87.902,82.098 U3.13 ; C10.2 87.3,117.487 88.2,118.387 v1(88.2,118.4) 88.249,118.351 88.249,118.201 88.975,117.475 R7.2 ; U2.4 U2.5 88.227,111.873 88.227,111.342 88.3,111.269 v1(88.3,111.2) ; C3.1 88.075,99.3 88.951,100.176 88.951,100.651 v1(89,100.7) 88.951,100.749 88.951,100.924 88.075,101.8 C2.2 ; U1.2 v1(89.7,91.7) ; U3.10 90.225,84.064 90.392,84.231 v1(90.392,84.3) ; v1(91.4,90.5) 91.412,90.488 91.412,89.587 S1.3 ; U3.5 U3.6 ; U3.7 U3.6 ; R3.2 v1(93.6,111.6) ; v1(92.9,80.8) 92.888,80.788 91.888,80.788 U3.6 ; R14.2 v1(96.9,91.8)
LBO_FLAG: R10.2 U3.12 U4.9 | length 17.8
  Top Layer w0.254: R10.2 76.3,75.9 76.66,76.26 U4.9 76.66,78.45 79.61,81.4 v1(83.3,81.4) ; v1(87.7,83.2) 87.749,83.151 88.249,83.151 88.325,83.075 U3.12
  Bottom Layer w0.254: v1(83.3,81.4) 85.1,83.2 v1(87.7,83.2)
NetC10_1: C10.1 U2.11 | length 1.9
  Top Layer w0.254: C10.1 87.3,115.069 87.673,114.696 87.673,114.227 U2.11
NetD1_2: D1.2 R15.2 | length 12.9
  Top Layer w0.254: R15.2 73.423,79.598 73.423,92.477 D1.2
NetD2_2: D2.2 R16.2 | length 2.4
  Top Layer w0.254: R16.2 79.212,74.813 81.533,74.813 D2.2
NetJ1_A5: J1.A5 R4.1 | length 3.8
  Top Layer w0.254: J1.A5 78.4,101.2 79.4,100.2 80.4,100.2 R4.1
NetJ1_B5: J1.B5 R5.1 | length 4.3
  Top Layer w0.254: J1.B5 77.504,100.2 77.753,99.951 77.753,99.935 78.908,98.78 79.645,98.78 R5.1
NetL1_2: L1.2 U3.3 U3.4 | length 6.7
  Top Layer w0.254: U3.3 96.85,79.125 L1.2
NetR1_2: R1.2 U1.5 | length 1.8
  Top Layer w0.254: R1.2 84.2,90.775 85.925,90.775 U1.5
NetR2_1: R2.1 R3.1 U2.6 | length 18
  Top Layer w0.254: R2.1 88.075,96.925 89.9,98.75 89.9,110.7 ; U2.6 89.9,110.7 ; R3.1 91.225,111.575 90.35,110.7 89.9,110.7
NetR6_1: R6.1 R8.1 U2.3 | length 12.9
  Top Layer w0.254: R6.1 80.8,107.4 81,107.2 86.723,107.2 86.872,107.349 86.872,107.897 R8.1 87.825,108.125 88.1,108.4 88.1,110.5 87.2,111.4 U2.3
NetR7_1: R7.1 U2.10 | length 2.1
  Top Layer w0.254: U2.10 88.2,115.15 88.975,115.925 R7.1
NetR9_2: R9.2 R12.1 U3.14 | length 7.1
  Top Layer w0.254: R12.1 R12.1@85.925,79.375 ; R9.2 86.6,76.9 86.9,77.2 86.9,78.4 R12.1@85.925,79.375 ; U3.14 87.6,81.425 86.874,80.699 86.874,80.324 R12.1@85.925,79.375
NetR11_2: R11.2 S1.1 U4.12 | length 16.7
  Top Layer w0.254: U4.12 80.47,78.45 81.72,79.7 83.65,79.7 84.875,80.925 R11.2 84.971,80.925 85.467,81.42 85.82,81.42 86,81.6 86,84.3 86.9,85.2 89.075,85.2 91.3,87.425 S1.1
NetR13_2: R13.2 R14.1 U3.9 | length 13
  Top Layer w0.254: U3.9 91.975,83.075 92.9,84 92.9,86.5 94.125,87.725 R14.1 R13.2
NetR15_1: R15.1 U4.8 | length 2
  Top Layer w0.254: R15.1 75.365,78.025 U4.8
NetR16_1: R16.1 U4.11 | length 1.6
  Top Layer w0.254: R16.1 U4.11
PM_OUT: C4.1 C5.2 C6.1 C14.2 R11.1 U2.1 U2.8 U4.1 | length 38.6
  Top Layer w0.254: C14.2 83.043,85.467 83.043,83.433 U4.1 83.95,83.4 84.875,82.475 R11.1 ; C5.2@85.195,113.17 C5.2 ; U2.8 U2.1 86.95,113.4 86.85,113.5 C5.2 ; 110.684,121.888 108.591,119.795 88.45,119.795 86.357,117.702 86.357,117.282 85.575,116.5 C4.1 C6.1 C5.2
USB_Present: U2.9 U4.4 | length 36.7
  Top Layer w0.254: U4.4 79.2,83.85 80.089,84.739 80.089,87.189 81.1,88.2 81.1,93 85,96.9 v1(85,101.8) ; U2.9 v1(89.5,114.2)
  Bottom Layer w0.254: v1(85,101.8) 90.5,107.3 90.5,113.2 v1(89.5,114.2)
pads on no net: S1.2 S1.4 U3.2 U3.17 U4.6 U4.7 U4.10 U4.13

## Polygon pours and split planes (outlines as drawn)
+VBAT on Top Layer "NONET_L01_P000" (solid, shelved, pour order 0): 72.3,72.6 72.3,124.3 140.8,124.3 140.8,72.6
GND on Bottom Layer "NONET_L02_P001" (solid, shelved, pour order 1): 72.3,124.3 72.3,72.6 140.8,72.6 140.8,124.2 140.7,124.3

## Silkscreen, mask and mechanical layers (free items; w line width, h text height)
Top Overlay:
  circle w0.2: c225.91,-262.437 r0.1
  circle w0.2: c277.67,-297.997 r0.1
  circle w0.2: c225.91,-285.297 r0.1
  circle w0.2: c277.67,-276.157 r0.1
  circle w0.2: c218.29,-252.277 r0.1
  circle w0.2: c279.25,-252.277 r0.1
  circle w0.2: c285.91,-196.537 r0.1
  circle w0.2: c337.67,-232.097 r0.1
  circle w0.2: c285.91,-219.397 r0.1
  circle w0.2: c337.67,-210.257 r0.1
  circle w0.2: c278.29,-186.377 r0.1
  circle w0.2: c339.25,-186.377 r0.1
  lines w0.127: 147.271,-76.648 147.313,-76.902 147.398,-77.135 147.567,-77.347 147.779,-77.516 148.011,-77.6 148.265,-77.643 212.272,-77.643 212.526,-77.6 212.758,-77.516 212.97,-77.347 213.139,-77.135 213.224,-76.902 213.266,-76.648 213.266,-75.104 215.805,-72.565 ; 84.427,-152.266 84.427,-100.976 84.469,-100.701 84.554,-100.469 84.723,-100.257 84.934,-100.109 85.167,-100.003 85.421,-99.961 148.899,-99.961 150.422,-101.484 150.422,-112.91 152.961,-115.449 152.961,-148.183 150.422,-150.722 150.422,-152.266 150.38,-152.52 150.295,-152.753 150.126,-152.964 149.914,-153.134 149.682,-153.218 149.428,-153.261 85.421,-153.261 85.167,-153.218 84.934,-153.134 84.723,-152.964 84.554,-152.753 84.469,-152.52 84.427,-152.266 ; 216.79,-299.537 ccw(c218.29,-299.537) 218.29,-301.037 227.79,-301.037 229.79,-303.037 262.79,-303.037 264.79,-301.037 285.29,-301.037 ccw(c285.29,-299.537) 286.79,-299.537 286.79,-222.037 ccw(c285.29,-222.037) 285.29,-220.537 218.29,-220.537 ccw(c218.29,-222.037) 216.79,-222.037 216.79,-299.537 ; 218.81,-299.267 218.81,-251.007 223.81,-251.007 223.81,-299.267 218.81,-299.267 ; 226.41,-299.517 226.41,-283.777 228.91,-283.777 228.91,-299.517 226.41,-299.517 ; 226.41,-281.737 226.41,-260.917 228.91,-260.917 228.91,-281.737 226.41,-281.737 ; 274.67,-299.517 274.67,-278.697 277.17,-278.697 277.17,-299.517 274.67,-299.517 ; 274.67,-277.677 274.67,-251.777 277.17,-251.777 277.17,-277.677 274.67,-277.677 ; 276.79,-233.637 ccw(c278.29,-233.637) 278.29,-235.137 287.79,-235.137 289.79,-237.137 322.79,-237.137 324.79,-235.137 345.29,-235.137 ccw(c345.29,-233.637) 346.79,-233.637 346.79,-156.137 ccw(c345.29,-156.137) 345.29,-154.637 278.29,-154.637 ccw(c278.29,-156.137) 276.79,-156.137 276.79,-233.637 ; 278.81,-233.367 278.81,-185.107 283.81,-185.107 283.81,-233.367 278.81,-233.367 ; 279.77,-299.267 279.77,-251.007 284.77,-251.007 284.77,-299.267 279.77,-299.267 ; 286.41,-233.617 286.41,-217.877 288.91,-217.877 288.91,-233.617 286.41,-233.617 ; 286.41,-215.837 286.41,-195.017 288.91,-195.017 288.91,-215.837 286.41,-215.837 ; 334.67,-233.617 334.67,-212.797 337.17,-212.797 337.17,-233.617 334.67,-233.617 ; 334.67,-211.777 334.67,-185.877 337.17,-185.877 337.17,-211.777 334.67,-211.777 ; 339.77,-233.367 339.77,-185.107 344.77,-185.107 344.77,-233.367 339.77,-233.367
Mechanical 1:
  lines w0.254: 72.3,72.6 72.3,124.3 140.8,124.3 140.8,72.6 72.3,72.6 ; 99.9,86.8 139.9,86.8 139.9,111.8 99.9,111.8 99.9,86.8
Top 3D Body:
  circle w0.2: c225.91,-262.437 r0.1
  circle w0.2: c277.67,-297.997 r0.1
  circle w0.2: c225.91,-285.297 r0.1
  circle w0.2: c277.67,-276.157 r0.1
  circle w0.2: c218.29,-252.277 r0.1
  circle w0.2: c279.25,-252.277 r0.1
  circle w0.2: c285.91,-196.537 r0.1
  circle w0.2: c337.67,-232.097 r0.1
  circle w0.2: c285.91,-219.397 r0.1
  circle w0.2: c337.67,-210.257 r0.1
  circle w0.2: c278.29,-186.377 r0.1
  circle w0.2: c339.25,-186.377 r0.1
  lines w0.127: 147.271,-76.648 147.313,-76.902 147.398,-77.135 147.567,-77.347 147.779,-77.516 148.011,-77.6 148.265,-77.643 212.272,-77.643 212.526,-77.6 212.758,-77.516 212.97,-77.347 213.139,-77.135 213.224,-76.902 213.266,-76.648 213.266,-75.104 215.805,-72.565 ; 84.427,-152.266 84.427,-100.976 84.469,-100.701 84.554,-100.469 84.723,-100.257 84.934,-100.109 85.167,-100.003 85.421,-99.961 148.899,-99.961 150.422,-101.484 150.422,-112.91 152.961,-115.449 152.961,-148.183 150.422,-150.722 150.422,-152.266 150.38,-152.52 150.295,-152.753 150.126,-152.964 149.914,-153.134 149.682,-153.218 149.428,-153.261 85.421,-153.261 85.167,-153.218 84.934,-153.134 84.723,-152.964 84.554,-152.753 84.469,-152.52 84.427,-152.266 ; 216.79,-299.537 ccw(c218.29,-299.537) 218.29,-301.037 227.79,-301.037 229.79,-303.037 262.79,-303.037 264.79,-301.037 285.29,-301.037 ccw(c285.29,-299.537) 286.79,-299.537 286.79,-222.037 ccw(c285.29,-222.037) 285.29,-220.537 218.29,-220.537 ccw(c218.29,-222.037) 216.79,-222.037 216.79,-299.537 ; 218.81,-299.267 218.81,-251.007 223.81,-251.007 223.81,-299.267 218.81,-299.267 ; 226.41,-299.517 226.41,-283.777 228.91,-283.777 228.91,-299.517 226.41,-299.517 ; 226.41,-281.737 226.41,-260.917 228.91,-260.917 228.91,-281.737 226.41,-281.737 ; 274.67,-299.517 274.67,-278.697 277.17,-278.697 277.17,-299.517 274.67,-299.517 ; 274.67,-277.677 274.67,-251.777 277.17,-251.777 277.17,-277.677 274.67,-277.677 ; 276.79,-233.637 ccw(c278.29,-233.637) 278.29,-235.137 287.79,-235.137 289.79,-237.137 322.79,-237.137 324.79,-235.137 345.29,-235.137 ccw(c345.29,-233.637) 346.79,-233.637 346.79,-156.137 ccw(c345.29,-156.137) 345.29,-154.637 278.29,-154.637 ccw(c278.29,-156.137) 276.79,-156.137 276.79,-233.637 ; 278.81,-233.367 278.81,-185.107 283.81,-185.107 283.81,-233.367 278.81,-233.367 ; 279.77,-299.267 279.77,-251.007 284.77,-251.007 284.77,-299.267 279.77,-299.267 ; 286.41,-233.617 286.41,-217.877 288.91,-217.877 288.91,-233.617 286.41,-233.617 ; 286.41,-215.837 286.41,-195.017 288.91,-195.017 288.91,-215.837 286.41,-215.837 ; 334.67,-233.617 334.67,-212.797 337.17,-212.797 337.17,-233.617 334.67,-233.617 ; 334.67,-211.777 334.67,-185.877 337.17,-185.877 337.17,-211.777 334.67,-211.777 ; 339.77,-233.367 339.77,-185.107 344.77,-185.107 344.77,-233.367 339.77,-233.367
Top Courtyard:
  lines w0.05: 72.177,72.669 72.177,72.676 ; 72.177,72.68 ccw(c73.359,72.597) 73.173,71.427 ; 72.177,124.209 72.219,124.484 72.304,124.717 72.473,124.929 72.684,125.077 72.917,125.183 73.171,125.225

## Text inside footprints (layer, text, board x,y; h text height)
U3: Top 3D Body "1" at 88.884,79.449 h1 r90
U4: Top 3D Body "1" at 82.502,82.224 h0.75 r270